# Altium PCB SCHMIDT.PcbDoc
Units mil, origin at the board's own origin, x right, y up, seen from the top; angles counter-clockwise.
Board outline 810.03 x 1230.03 mil, 2 copper layers (Top Layer, Bottom Layer); 17 components, 20 nets, 56 pads, 0 vias.
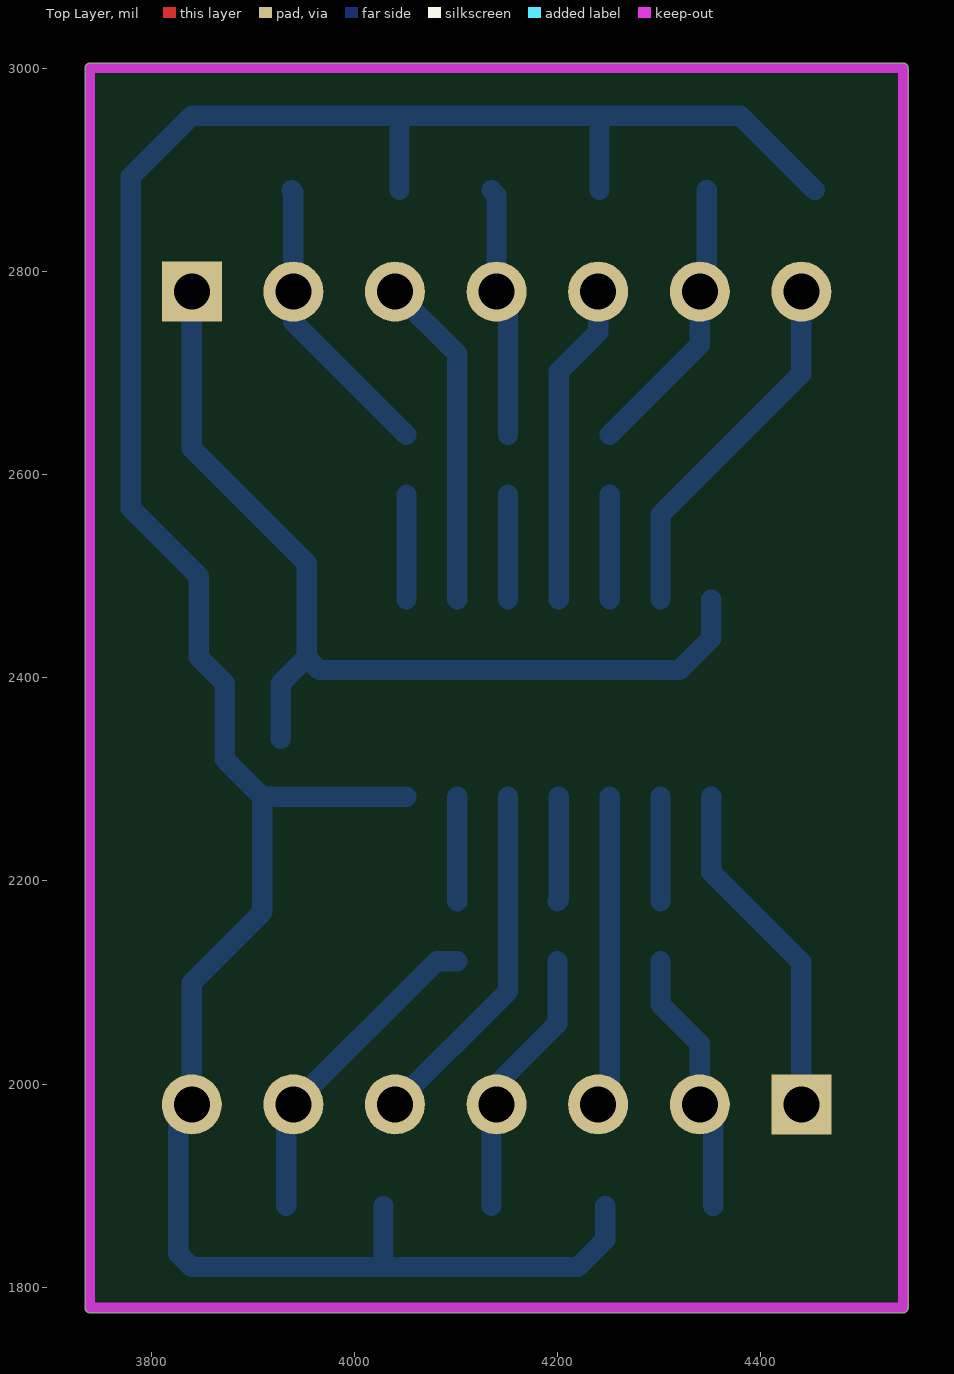
[diagram p0: Top Layer view]
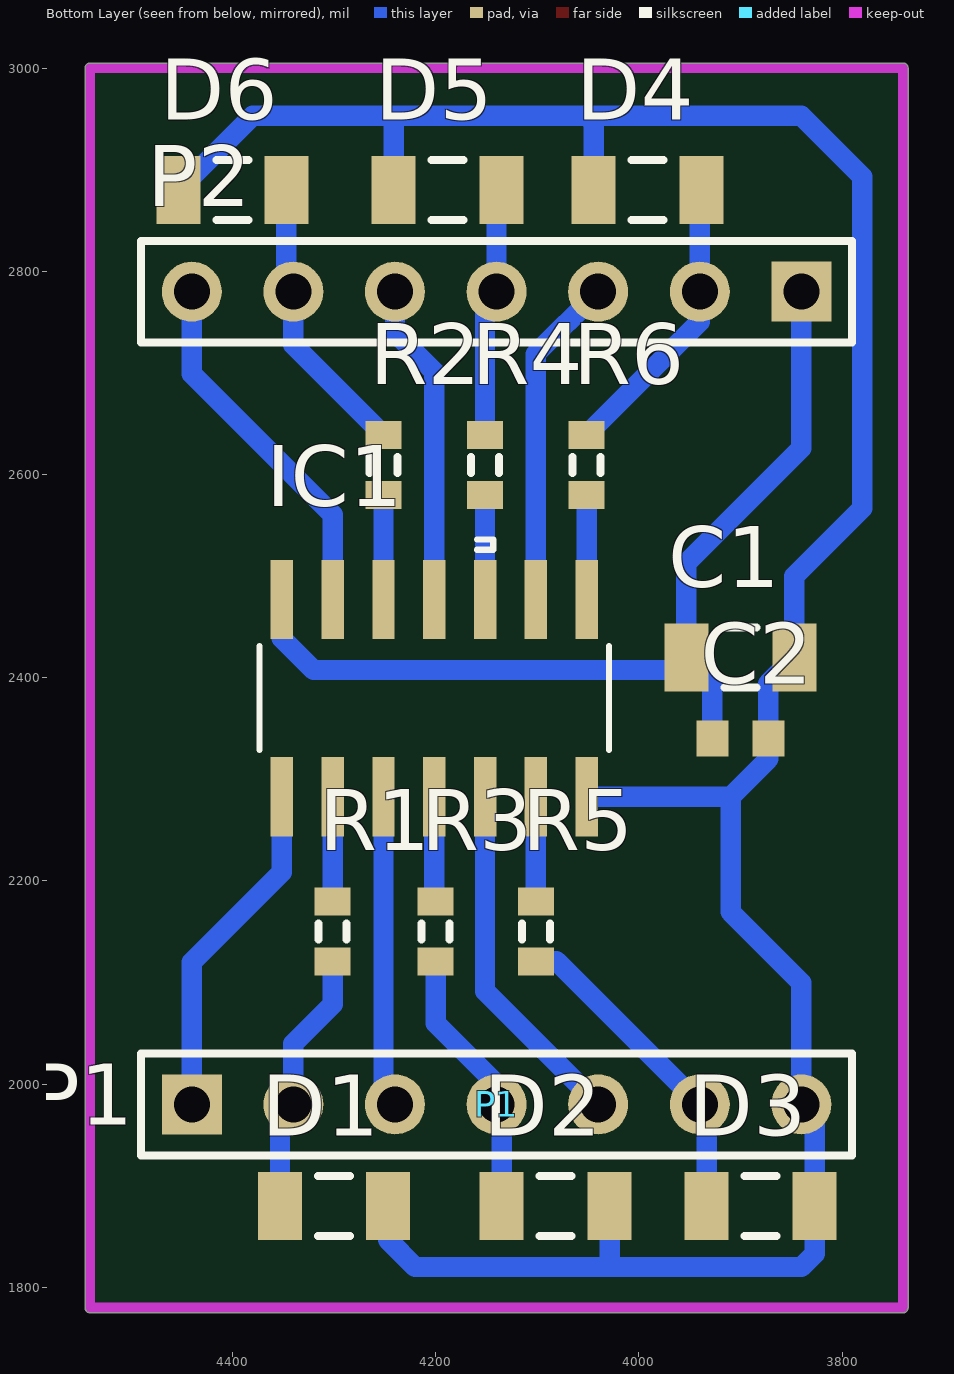
[diagram p1: Bottom Layer view, seen from below]

## Layer stack, top to bottom
Top Solder: solder mask 0.4, Solder Resist, Dk 3.5
Top Layer: signal copper 1.4
Dielectric 1: dielectric 12.6, FR-4, Dk 4.8
Bottom Layer: signal copper 1.4
Bottom Solder: solder mask 0.4, Solder Resist, Dk 3.5

## Board outline
4545.02,1780 cw(c4540,1780) 4540,1774.98 3740,1774.98 cw(c3740,1780) 3734.99,1780 3734.99,3000 cw(c3740,3000) 3740,3005.01 4540,3005.01 cw(c4540,3000) 4545.02,3000

## Design rules (kind name [scope] priority, off if disabled: settings)
Clearance [All] p1: gap=10 ignorepadtopadclearanceinfootprint=FALSE except(0: Arc-Hole Track-Hole SMDPad-Hole THPad-Hole Via-Hole Fill-Hole Poly-Hole Region-Hole Text-Hole)
PolygonConnect [All] p1: connectstyle=Relief reliefconductorwidth=10 reliefentries=4 polygonreliefangle="90 Angle" airgapwidth=10
RoomDefinition SCHMIDT [InComponentClass('SCHMIDT')] p1: confinementstyle=ConfineIn formatcopy=TRUE lockcomponents=FALSE outline 4540,1780 3740,1780 3740,3000 4540,3000
RoutingLayers [All] p1: top layer_v5=FALSE bottom layer_v5=TRUE
RoutingVias [All] p1: holewidth=28 width=50 viastyle="Through Hole" minholewidth=28 minwidth=50 maxholewidth=28 maxwidth=50
SolderMaskExpansion [All] p1: expansion=4
Width [All] p1: maxlimit=50 minlimit=10 preferedwidth=20 bottomlayer_prefwidth=10 minimp=50.000000 maximp=50.000000 favimp=50.000000
29 further rules are at their usual default settings.

## Components (designator, comment, footprint, x,y, rotation, side; value= is the part's Value field where it differs from the comment)
C1 "Cap" C1206 3900,2420 r0 bottom value=10uF
C2 "Cap" 1608[0603] 3900,2340 r0 bottom value=0.1uF
D1 "D Zener" C1206 4300,1880 r0 bottom
D2 "D Zener" C1206 4081.85,1880 r0 bottom
D3 "D Zener" C1206 3880,1880 r0 bottom
D4 "D Zener" C1206 3991.3,2880 r180 bottom
D5 "D Zener" C1206 4188.15,2880 r180 bottom
D6 "D Zener" C1206 4400,2880 r180 bottom
IC1 "74HC14D,653" SOIC127P600X175-14N 4201.3,2380 r90 bottom
P1 "Header 7" HDR1X7 4440,1980 r180 bottom
P2 "Header 7" HDR1X7 3840,2780 r0 bottom
R1 "Res1" J1-0603 4301.3,2150.47 r270 bottom value=10K
R2 "Res1" J1-0603 4251.3,2609.53 r270 bottom value=10K
R3 "Res1" J1-0603 4200,2150.47 r270 bottom value=10K
R4 "Res1" J1-0603 4151.3,2609.53 r270 bottom value=10K
R5 "Res1" J1-0603 4101.3,2150.47 r270 bottom value=10K
R6 "Res1" J1-0603 4051.3,2609.53 r270 bottom value=10K

## Footprints (in the part's own frame and the unit in brackets; to place one, negate y for a bottom-side part, rotate by r counter-clockwise, add the part's x,y. Pads: shape width x height; smd on the part's side, far side on the other; paste and mask are expansions set on the pad)
1608[0603] [mm] "Chip Capacitor, Body 1.6x0.8mm, IPC High Density"
  rect 0.8x0.9 smd: 1(-0.7,0) 2(0.7,0)
  body extent -0.87,-0.48 0.87,0.48, height 1.3
C1206 [mm] "Chip Capacitor, Body 3.2x1.6mm, IPC High Density"
  rect 1.1x1.7 smd: 1(-1.35,0) 2(1.35,0)
  silkscreen extent -0.4,-0.75 0.4,0.75, body extent -1.7,-0.9 1.7,0.9, height 1.3
HDR1X7 [mm] "Connector; Header; 7 Position"
  rect 1.5x1.5 hole 0.9: 1(0,0)
  round 1.5 hole 0.9: 2(2.54,0) 3(5.08,0) 4(7.62,0) 5(10.16,0) 6(12.7,0) 7(15.24,0)
  silkscreen extent -1.27,-1.27 16.51,1.27
J1-0603 [mm] "Chip Resistor, Body 1.6x0.8mm, IPC High Density"
  rect 0.7x0.9 smd: 1(-0.75,0) 2(0.75,0)
  silkscreen extent -0.2,-0.35 0.2,0.35, body extent -0.85,-0.48 0.85,0.48, height 0.9
SOIC127P600X175-14N [mil]
  rect 78x22 smd: 1(-97,150) 2(-97,100) 3(-97,50) 4(-97,0) 5(-97,-50) 6(-97,-100) 7(-97,-150) 8(97,-150) 9(97,-100) 10(97,-50) 11(97,0) 12(97,50) 13(97,100) 14(97,150)
  silkscreen extent -51,-172 156,172

## Part data
C1 C2: "Capacitor", LatestRevisionDate=17-Jul-2002, LatestRevisionNote="Re-released for DXP Platform.", PackageDescription="Radial Cap, Thru-Hole; 2 Leads; 0.3 in Pin Spacing", PackageReference=RAD-0.3, Published=8-Jun-2000, Publisher="Altium Limited"
D1 D2 D3 D4 D5 D6: "Zener Diode", LatestRevisionDate=17-Jul-2002, LatestRevisionNote="Re-released for DXP Platform.", PackageDescription="Diode, Thru-Hole; 2 Leads; 0.7 in Pin Spacing", PackageReference=DIODE-0.7, Published=8-Jun-2000, Publisher="Altium Limited"
IC1: "Integrated Circuit", Manufacturer_Name=Nexperia, Mouser Part Number=771-74HC14D-T, RS Part Number=1707953, Datasheet Link=http://www.nxp.com/acrobat_download/datasheets/74HC_HCT14_3.pdf, Height=1.75mm, Manufacturer_Part_Number=74HC14D,653, Mouser Price/Stock=https://www.mouser.com/Search/Refine.aspx?Keyword=771-74HC14D-T, RS Price/Stock=http://uk.rs-online.com/web/p/products/1707953
P1 P2: "Header, 7-Pin", LatestRevisionDate=17-Jul-2002, LatestRevisionNote="Re-released for DXP Platform.", Publisher="Altium Limited"
R1 R2 R3 R4 R5 R6: "Resistor", LatestRevisionDate=17-Jul-2002, LatestRevisionNote="Re-released for DXP Platform.", PackageDescription="Axial Device, Thru-Hole; 2 Leads; 0.3 in Pin Spacing", PackageReference=AXIAL-0.3, Published=8-Jun-2000, Publisher="Altium Limited"

## Nets (pads, with @x,y where several pads share a name; then routed paths per layer and width w, separated by ;. In a path a pad name is that pad's centre, name@x,y a point inside that pad or via, vN(x,y) a via of type N, cw(c..) or ccw(c..) an arc to the next point about the centre after c; other vN are vias at no path point)
+5V: C1.2 C2.2 IC1.14 P2.1 | length 951.9
  Bottom Layer w20: P2.1 3840,2625.91 3953.15,2512.76 C1.2 ; C2.2 3927.56,2394.41 C1.2 ; IC1.14 4351.3,2438.86 4320,2407.56 3965.59,2407.56 C1.2
GND: C1.1 C2.1 D1.1 D2.1 D3.1 D4.1 D5.1 D6.1 IC1.7 P1.7 | length 2697.9
  Bottom Layer w20: D2.1 4028.7,1821.3 4030,1820 ; D4.1 4044.45,2946.3 4051.3,2953.15 ; IC1.7 3909.44,2283 ; D5.1 4241.3,2951.85 4240,2953.15 ; D1.1 4246.85,1846.85 4220,1820 4030,1820 ; D6.1 4380,2953.15 4240,2953.15 ; 3909.44,2283 3909.44,2169.44 3840,2100 P1.7 3826.85,1966.85 D3.1 3826.85,1833.15 3840,1820 4030,1820 ; 3909.44,2283 3872.44,2320 C2.1 3872.44,2394.41 C1.1 3846.85,2500 3780,2566.85 3780,2893.15 3840,2953.15 4051.3,2953.15 ; 4051.3,2953.15 4240,2953.15
IN1: IC1.1 P1.1 | length 339.7
  Bottom Layer w20: IC1.1 4351.3,2208.7 4440,2120 P1.1
IN2: IC1.3 P1.3 | length 307.7
  Bottom Layer w20: P1.3 4251.3,1991.3 IC1.3
IN3: IC1.5 P1.5 | length 349.1
  Bottom Layer w20: P1.5 4151.3,2091.3 IC1.5
IN4: IC1.9 P2.3 | length 328.4
  Bottom Layer w20: P2.3 4101.3,2718.7 IC1.9
IN5: IC1.11 P2.5 | length 319
  Bottom Layer w20: IC1.11 4201.3,2701.3 4240,2740 P2.5
IN6: IC1.13 P2.7 | length 360.5
  Bottom Layer w20: IC1.13 4301.3,2560.35 4440,2699.06 P2.7
NetIC1_2: IC1.2 R1.1 | length 103
  Bottom Layer w20: R1.1 IC1.2
NetIC1_4: IC1.4 R3.1 | length 103.5
  Bottom Layer w20: R3.1 4201.3,2181.3 IC1.4
NetIC1_6: IC1.6 R5.1 | length 103
  Bottom Layer w20: R5.1 IC1.6
NetIC1_8: IC1.8 R6.2 | length 103
  Bottom Layer w20: IC1.8 R6.2
NetIC1_10: IC1.10 R4.2 | length 103
  Bottom Layer w20: IC1.10 R4.2
NetIC1_12: IC1.12 R2.2 | length 103
  Bottom Layer w20: IC1.12 R2.2
OUT1: D1.2 P1.2 R1.2 | length 262.4
  Bottom Layer w20: R1.2 4301.3,2078.7 4340,2040 P1.2 4353.15,1966.85 D1.2
OUT2: D2.2 P1.4 R3.2 | length 267.9
  Bottom Layer w20: D2.2 4135,1975 P1.4 4140,2000 4200,2060 R3.2
OUT3: D3.2 P1.6 R5.2 | length 322.5
  Bottom Layer w20: D3.2 3933.15,1973.15 P1.6 4080.94,2120.94 R5.2
OUT4: D4.2 P2.2 R6.1 | length 287.8
  Bottom Layer w20: D4.2 3940,2878.15 P2.2 3940,2750.35 R6.1
OUT5: D5.2 P2.4 R4.1 | length 247.7
  Bottom Layer w20: D5.2 4140,2875 P2.4 4151.3,2768.7 R4.1
OUT6: D6.2 P2.6 R2.1 | length 280.5
  Bottom Layer w20: R2.1 4340,2727.76 P2.6 4346.85,2786.85 D6.2

## Keep-outs
Keep-Out Layer:
  lines w10: 3740,1780 3740,3000 4540,3000 4540,1780 3740,1780